# Altium PCB CH32F207&V307V-R3-2v0.PcbDoc (part 1 of 2)
Units mil, origin at the board's own origin, x right, y up, seen from the top; angles counter-clockwise.
Board outline 2913.39 x 3937.01 mil, 2 copper layers (Top Layer, Bottom Layer); 74 components, 114 nets, 419 pads, 786 vias.
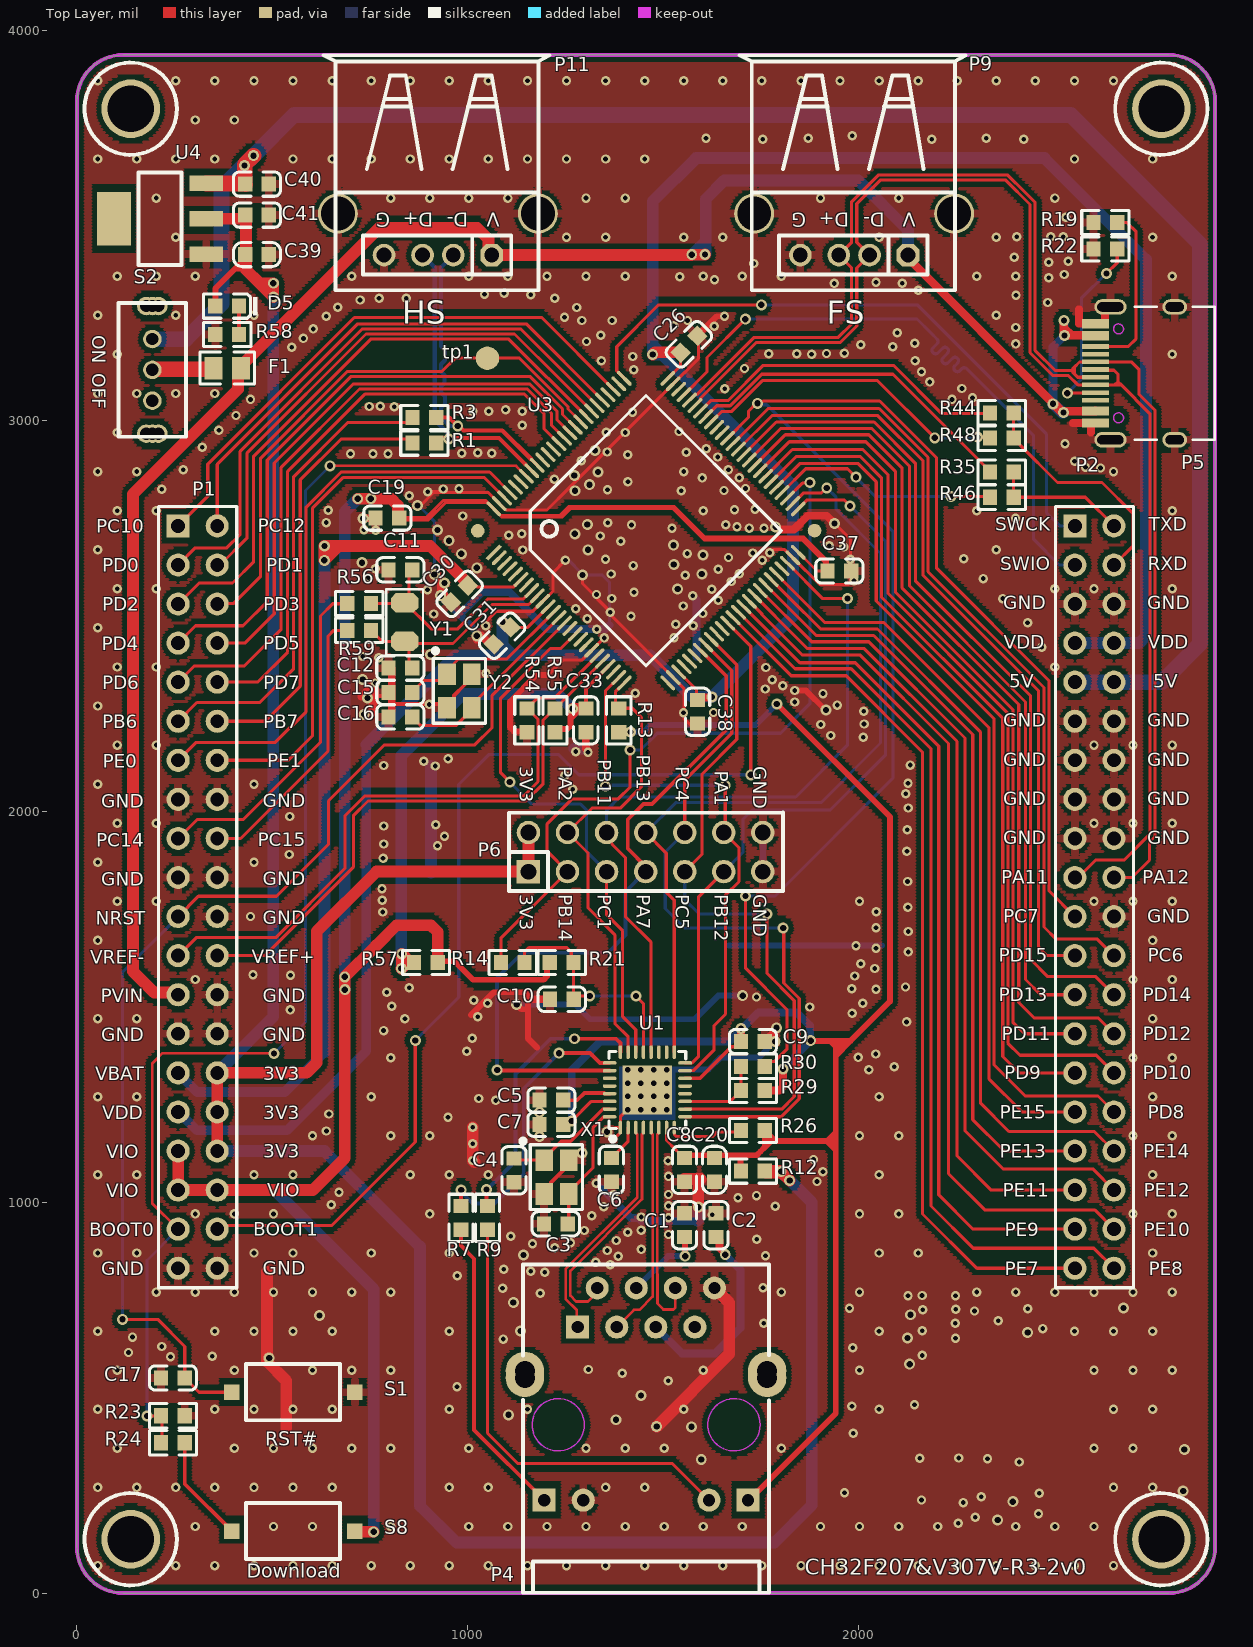
[diagram p0: Top Layer view]
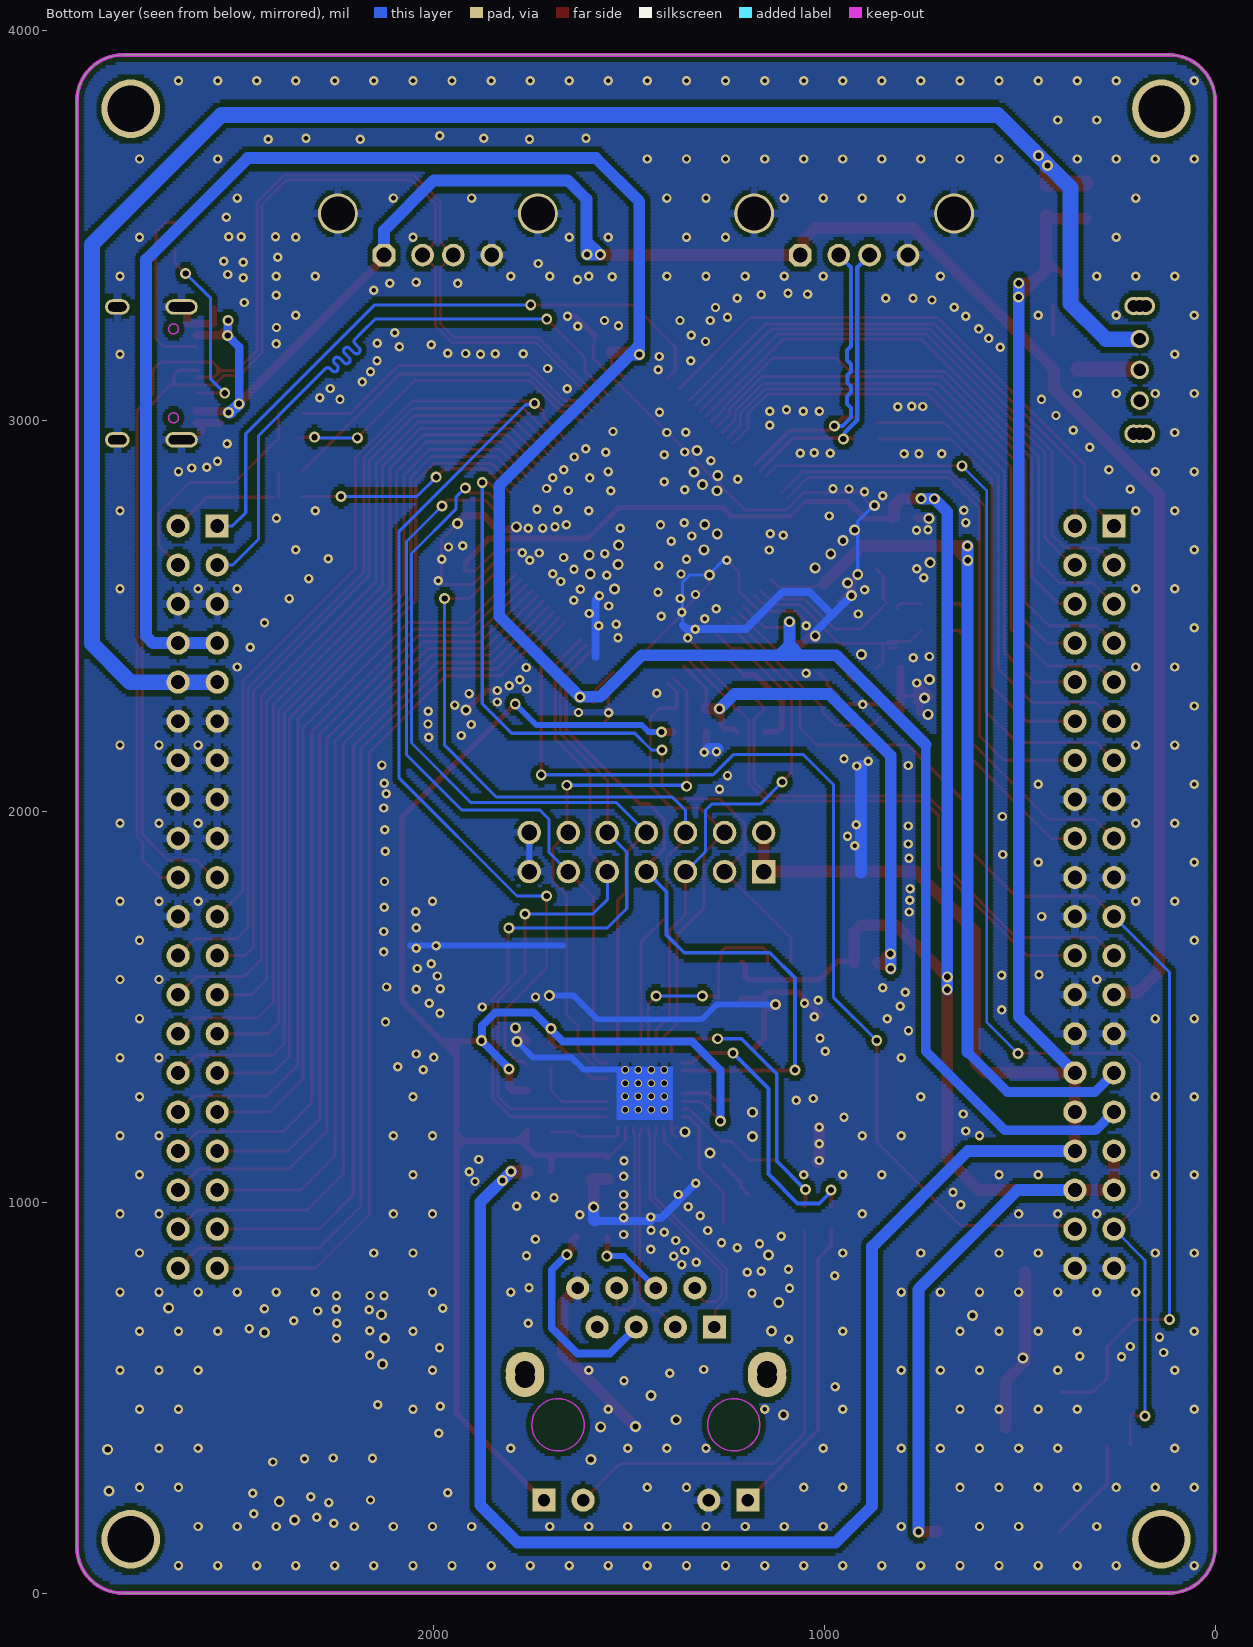
[diagram p1: Bottom Layer view, seen from below]

## Layer stack, top to bottom
Top Solder: solder mask 0.4, Solder Resist, Dk 3.5
Top Layer: signal copper 1.4
Dielectric 1: dielectric 12.6, FR-4, Dk 4.8
Bottom Layer: signal copper 1.4
Bottom Solder: solder mask 0.4, Solder Resist, Dk 3.5

## Board outline
0,118.11 0,3818.9 cw(c118.11,3818.9) 118.11,3937.01 2795.54,3937.01 2795.28,3937.01 cw(c2795.28,3818.9) 2913.39,3818.9 2913.38,3818.9 2913.39,118.06 2913.39,118.11 cw(c2795.28,118.11) 2795.28,0 118.11,0 cw(c118.11,118.11)

## Design rules (kind name [scope] priority, off if disabled: settings)
Clearance Clearance_2 [InPolygon] p1: gap=12 ignorepadtopadclearanceinfootprint=FALSE
Clearance [All] p2: gap=5 ignorepadtopadclearanceinfootprint=FALSE except(7: Arc-Via Track-Via SMDPad-Via THPad-Via Via-Via Via-Fill Via-Poly Via-Region Via-Text Via-Hole)
ComponentClearance [All] p1 off: gap=10 collisioncheckmode=3 verticalgap=10 showdistances=FALSE
DiffPairsRouting [All] p1: maxlimit=10 minlimit=5 mostfreqgap=10 toplayer_minwidth=6 toplayer_maxwidth=15 toplayer_prefwidth=15 bottomlayer_minwidth=6 bottomlayer_maxwidth=15 bottomlayer_prefwidth=15 maxuncoupledlength=500
MinimumSolderMaskSliver [All] p1 off: minsoldermaskwidth=10
PolygonConnect PolygonConnect_1 [IsVia] p1: connectstyle=Direct reliefconductorwidth=10 reliefentries=4 polygonreliefangle="90 Angle" airgapwidth=10
PolygonConnect [All] p2: connectstyle=Relief reliefconductorwidth=20 reliefentries=4 polygonreliefangle="90 Angle" airgapwidth=10
RoutingVias [All] p1: holewidth=28 width=50 viastyle="Through Hole" minholewidth=12 minwidth=24 maxholewidth=28 maxwidth=50
SilkToSilkClearance [All] p1 off: silktosilkclearance=10
SilkToSolderMaskClearance [IsPad] p1 off: minsilkscreentomaskgap=10 clearancetoexposedcopper=TRUE
SolderMaskExpansion [All] p1: expansion=4 istentingtop=FALSE
Width [All] p1: maxlimit=100 minlimit=5 preferedwidth=10
25 further rules are at their usual default settings.

## Classes and differential pairs
component class CH32F207&V307V-R3-2v0: C1 C2 C3 C4 C5 C6 C7 C8 C9 C10 C11 C12 C15 C16 C17 C19 C20 C26 C30 C31 C33 C37 C38 C39 C40 C41 D5 F1 P1 P2 P4 P5 P6 P9 P11 R1 R3 R7 R9 R12 R13 R14 R19 R21 R22 R23 R24 R26 R29 R30 R35 R44 R46 R48 R54 R55 R56 R57 R58 R59 S1 S2 S8 tp1 U1 U3 U4 X1 Y1 Y2
differential pair MDI_TX: +MDI_TX_P -MDI_TX_N
differential pair MDI_RX: +MDI_RX_P -MDI_RX_N
differential pair USB1D: +USB1D_p -USB1D_n
differential pair USB2D: +USB2D_p -USB2D_n

## Components (designator, comment, footprint, x,y, rotation, side; value= is the part's Value field where it differs from the comment)
C1 "1uF" 0603_C#1 1555.17,941.67 r270 top
C2 "1uF" 0603_C#1 1635.7,941.67 r270 top
C3 "NC" 0603_C#1 1225.72,945.26 r0 top
C4 "NC" 0603_C#1 1118.64,1082.21 r90 top
C5 "0.1uF" 0603_C#2 1184.23,1261.57 r0 top
C6 "1uF" 0603_C#1 1368.09,1083.21 r90 top
C7 "0.1uF" 0603_C#1 1214.55,1199.71 r0 top
C8 "0.1uF" 0603_C#1 1555.17,1083.21 r90 top
C9 "0.1uF" 0603_C#1 1730.28,1411.72 r180 top
C10 "0.1uF" 0603_C#2 1210.77,1519.95 r0 top
C11 "12pF" 0603_C#1 827.96,2619.12 r0 top
C12 "12pF" 0603_C#1 827.96,2367.29 r0 top
C15 "20pF" 0603_C#1 827.96,2305.51 r0 top
C16 "20pF" 0603_C#1 827.96,2242.28 r0 top
C17 "0.1uF" 0603_C#1 245.8,550.68 r0 top
C19 "0.1uF" 0603_C#1 794.73,2751.51 r180 top
C20 "10uF" 0603_C#3 1631.81,1052.9 r90 top
C26 "0.1uF" 0603_C#1 1566.47,3196.35 r225 top
C30 "0.1uF" 0603_C#1 979.48,2557.49 r45 top
C31 "0.1uF" 0603_C#1 1088.42,2450.44 r225 top
C33 "0.1uF" 0603_C#1 1302.56,2233.7 r270 top
C37 "0.1uF" 0603_C#1 1951.53,2616.04 r180 top
C38 "0.1uF" 0603_C#1 1588.66,2255.8 r90 top
C39 "10uF" 0603_C#3 430.55,3425.83 r0 top
C40 "0.1uF" 0603_C#1 460.87,3606.32 r0 top
C41 "0.1uF" 0603_C#1 460.87,3526.95 r0 top
D5 "蓝灯 0603" 0603_LED_S1 384.77,3294.04 r180 top
F1 "500mA" 0805 420.13,3135.37 r180 top
P1 "Header 20X2" HDR2X20 259.1,2731.51 r270 top
P2 "Header 20X2" HDR2X20 2554.28,2731.51 r270 top
P4 "HR911105A" HR911105A 1281.72,680.88 r0 top
P5 "USBFS" TYPE-C-Receptacle-2.0 2607.08,3121.88 r90 top
P6 "Header 7X2" IDC14-2.54mm 1155.72,1846.68 r90 top
P9 "USB" USBAF 2127.17,3424.57 r180 top
P11 "USB" USBAF 1061.8,3424.57 r180 top
R1 "0Ω" 0603 919.64,2943.45 r180 top
R3 "0Ω" 0603 919.64,3008.94 r180 top
R7 "470Ω" 0603 983.15,930.15 r90 top
R9 "470Ω" 0603 1050.89,930.15 r90 top
R12 "0Ω" 0603 1699.97,1080.19 r0 top
R13 "1.5K" 0603 1386.85,2203.39 r90 top
R14 "NC(0Ω)" 0603 1145.88,1614.12 r180 top
R19 "5.1K" 0603 2662.62,3507.98 r180 top
R21 "4.7K" 0603 1271.24,1614.12 r180 top
R22 "5.1K" 0603 2662.62,3440.28 r180 top
R23 "10K" 0603 215.49,453.94 r0 top
R24 "1K" 0603 215.49,384.84 r0 top
R26 "4.7K" 0603 1760.6,1184.11 r180 top
R29 "NC(4.7k)" 0603 1699.97,1286.53 r0 top
R30 "0Ω" 0603 1699.97,1348.23 r0 top
R35 "0Ω" 0603 2397.58,2869.04 r180 top
R44 "0Ω" 0603 2397.58,3020.84 r180 top
R46 "NC(0Ω)" 0603 2397.58,2804.8 r180 top
R48 "NC(0Ω)" 0603 2397.58,2955.92 r180 top
R54 "0Ω" 0603 1151.71,2203.39 r90 top
R55 "0Ω" 0603 1223.59,2203.39 r90 top
R56 "0Ω" 0603 752.92,2532.57 r180 top
R57 "0Ω" 0603 923.67,1614.12 r180 top
R58 "470Ω" 0603 354.45,3221.37 r0 top
R59 "0Ω" 0603 752.92,2464.16 r180 top
S1 "RST#" SMD_6.1x3.65x2.5mm-KEY 711.58,514.18 r180 top
S2 "SW SPDT" "Horizontal Slide Switch_8.7x4.4mm-2D" 106.49,3302.11 r270 top
S8 "Download" SMD_6.1x3.65x2.5mm-KEY 711.58,158.82 r180 top
tp1 "test-point" POINT 1050.77,3160.87 r0 top
U1 "CH182H" QFN32_5x5 1460.02,1288.04 r0 top
U3 "CH32V307VCT6/CH32F207VCT6" LQFP100 1066.95,2663.69 r315 top
U4 "1117-3.3V" SOT-223 213.1,3517.62 r0 top
X1 "25MHz" SMD-3225_4P 1227.31,1064.83 r270 top
Y1 "32768Hz" FC-135 838.79,2534.25 r270 top
Y2 "8MHz" SMD-3225_4P 978.93,2308.95 r270 top
? "" HOLE 2775.59,137.8 r0 top
? "" HOLE 137.8,137.8 r0 top
? "" HOLE 137.8,3799.21 r0 top
? "" HOLE 2775.59,3799.21 r0 top

## Footprints (in the part's own frame and the unit in brackets; to place one, negate y for a bottom-side part, rotate by r counter-clockwise, add the part's x,y. Pads: shape width x height; smd on the part's side, far side on the other; paste and mask are expansions set on the pad)
0603 [mm]
  rect 0.93x0.98 smd: 1(0,0) 2(1.54,0)
  silkscreen extent -0.76,-0.79 2.3,0.79
0603_C#1 [mm]
  rect 0.93x0.98 smd: 1(-0.77,0) 2(0.77,0)
  silkscreen extent -1.53,-0.79 1.54,0.79, body extent -0.8,-0.4 0.8,0.4, height 0.3
0603_C#2 [mm]
  rect 0.93x0.98 smd: 1(0,0) 2(1.54,0)
  silkscreen extent -0.76,-0.79 2.31,0.79
0603_C#3 [mm]
  rect 0.93x0.98 smd mask+0.051: 1(0,0) 2(1.54,0)
  silkscreen extent -0.76,-0.79 2.31,0.79
0603_LED_S1 [mm]
  rect 0.93x0.98 smd: A(0.77,0) K(-0.77,0)
  silkscreen extent -1.98,-0.79 1.54,0.79, body extent -0.8,-0.4 0.8,0.4, height 0.6
0805 [mm]
  rect 1.16x1.47 smd: 1(0,0) 2(1.78,0)
  silkscreen extent -0.88,-1.04 2.66,1.03
FC-135 [mil]
  oct 50x70 smd: 1(0,0) 2(98.43,0)
  silkscreen extent -35,-47 133,47
HDR2X20 [mm] "Connector; Header; 20x2 Position"
  rect 1.5x1.5 hole 0.9: 1(0,0)
  round 1.5 hole 0.9: 2(0,2.54) 3(2.54,0) 4(2.54,2.54) 5(5.08,0) 6(5.08,2.54) 7(7.62,0) 8(7.62,2.54) 9(10.16,0) 10(10.16,2.54) 11(12.7,0) 12(12.7,2.54) 13(15.24,0) 14(15.24,2.54) 15(17.78,0) 16(17.78,2.54) 17(20.32,0) 18(20.32,2.54) 19(22.86,0) 20(22.86,2.54) 21(25.4,0) 22(25.4,2.54) 23(27.94,0) 24(27.94,2.54) 25(30.48,0) 26(30.48,2.54) 27(33.02,0) 28(33.02,2.54) 29(35.56,0) 30(35.56,2.54) 31(38.1,0) 32(38.1,2.54) 33(40.64,0) 34(40.64,2.54) 35(43.18,0) 36(43.18,2.54) 37(45.72,0) 38(45.72,2.54) 39(48.26,0) 40(48.26,2.54)
  silkscreen extent -1.27,-1.27 49.53,3.81
HOLE [mm]
  round 3.81 hole 3: 0(0,0)
  silkscreen extent -3,-3 3,3
"Horizontal Slide Switch_8.7x4.4mm-2D" [mm]
  round 1.2 hole 0.8: 0(0.2,2.6) 0(0.2,2.2) 0(0.2,1.8) 0(8.5,1.8) 0(8.5,2.2) 0(8.5,2.6) 1(4.35,2.2) 2(2.35,2.2) 3(6.35,2.2)
  silkscreen extent 0,0 8.7,4.4
HR911105A [mm]
  rect 1.5x1.5 hole 0.8: 1(0,0) 9(-2.175,-11.252) 12(11.075,-11.252)
  round 1.5 hole 0.8: 2(1.27,2.54) 3(2.54,0) 4(3.81,2.54) 5(5.08,0) 6(6.35,2.54) 7(7.62,0) 8(8.89,2.54) 10(0.365,-11.252) 11(8.535,-11.252)
  round 2.5 hole 1.3: ""(-3.43,-2.852) ""(-3.43,-3.3) ""(12.32,-3.3) ""(12.32,-2.852)
  Keep-Out Layer circle w0.1: c-1.265,-6.352 r1.7
  Keep-Out Layer circle w0.1: c10.165,-6.352 r1.7
  silkscreen extent -3.55,-17.27 12.45,4.06
IDC14-2.54mm [mil]
  rect 60x60 hole 40: 1(0,0)
  round 60 hole 40: 2(100,0) 3(0,-100) 4(100,-100) 5(0,-200) 6(100,-200) 7(0,-300) 8(100,-300) 9(0,-400) 10(100,-400) 11(0,-500) 12(100,-500) 13(0,-600) 14(100,-600)
  silkscreen extent -50,-652 151,50
LQFP100 [mil]
  round 35 smd mask+2: 0(-68,10) 0(541.18,620)
  rect 9x50 smd mask+2: 1(0,0)
  oval 9x50 smd mask+2: 2(19.69,0) 3(39.37,0) 4(59.06,0) 5(78.74,0) 6(98.43,0) 7(118.11,0) 8(137.8,0) 9(157.48,0) 10(177.17,0) 11(196.85,0) 12(216.54,0) 13(236.22,0) 14(255.91,0) 15(275.59,0) 16(295.28,0) 17(314.96,0) 18(334.64,0) 19(354.33,0) 20(374.01,0) 21(393.7,0) 22(413.38,0) 23(433.07,0) 24(452.75,0) 25(472.44,0) 51(472.44,629.92) 52(452.75,629.92) 53(433.07,629.92) 54(413.39,629.92) 55(393.7,629.92) 56(374.02,629.92) 57(354.33,629.92) 58(334.65,629.92) 59(314.96,629.92) 60(295.27,629.92) 61(275.59,629.92) 62(255.9,629.92) 63(236.22,629.92) 64(216.54,629.92) 65(196.85,629.92) 66(177.17,629.92) 67(157.48,629.92) 68(137.8,629.92) 69(118.11,629.92) 70(98.43,629.92) 71(78.74,629.92) 72(59.06,629.92) 73(39.37,629.92) 74(19.69,629.92) 75(0,629.92)
  oval 50x9 smd mask+2: 26(551.18,78.74) 27(551.18,98.43) 28(551.18,118.11) 29(551.18,137.8) 30(551.18,157.48) 31(551.18,177.17) 32(551.18,196.85) 33(551.18,216.54) 34(551.18,236.22) 35(551.18,255.91) 36(551.18,275.59) 37(551.18,295.28) 38(551.18,314.96) 39(551.18,334.65) 40(551.18,354.33) 41(551.18,374.02) 42(551.18,393.7) 43(551.18,413.39) 44(551.18,433.07) 45(551.18,452.76) 46(551.18,472.44) 47(551.18,492.13) 48(551.18,511.81) 49(551.18,531.5) 50(551.18,551.18) 76(-78.74,551.18) 77(-78.74,531.5) 78(-78.74,511.81) 79(-78.74,492.13) 80(-78.74,472.44) 81(-78.74,452.76) 82(-78.74,433.07) 83(-78.74,413.39) 84(-78.74,393.7) 85(-78.74,374.02) 86(-78.74,354.33) 87(-78.74,334.65) 88(-78.74,314.96) 89(-78.74,295.28) 90(-78.74,275.59) 91(-78.74,255.91) 92(-78.74,236.22) 93(-78.74,216.54) 94(-78.74,196.85) 95(-78.74,177.17) 96(-78.74,157.48) 97(-78.74,137.8) 98(-78.74,118.11) 99(-78.74,98.43) 100(-78.74,78.74)
  silkscreen extent -8,70 481,560
POINT [mil] "测试点"
  round 60 smd: 1(0,0)
QFN32_5x5 [mil]
  round 20 hole 14 mask+2: 0(-50.12,-51.11) 0(-50.12,51.11) 0(-16.71,-16.7) 0(-16.71,16.7) 0(16.71,-16.7) 0(16.71,16.7) 0(50.12,-51.11) 0(50.12,51.11)
  rect 125.98x125.98 smd mask+2: 0(0,0)
  oval 9x35 smd mask+2: 1(-68.9,-96.49) 2(-49.21,-96.49) 3(-29.53,-96.49) 4(-9.84,-96.49) 5(9.84,-96.49) 6(29.53,-96.49) 7(49.21,-96.49) 8(68.9,-96.49) 17(68.9,96.49) 18(49.21,96.49) 19(29.53,96.49) 20(9.84,96.49) 21(-9.84,96.49) 22(-29.53,96.49) 23(-49.21,96.49) 24(-68.9,96.49)
  oval 35x9 smd mask+2: 9(96.49,-68.9) 10(96.49,-49.21) 11(96.49,-29.53) 12(96.49,-9.84) 13(96.49,9.84) 14(96.49,29.53) 15(96.49,49.21) 16(96.49,68.9) 25(-96.49,68.9) 26(-96.49,49.21) 27(-96.49,29.53) 28(-96.49,9.84) 29(-96.49,-9.84) 30(-96.49,-29.53) 31(-96.49,-49.21) 32(-96.49,-68.9)
  silkscreen extent -98,-131 98,98
SMD-3225_4P [mm]
  rect 1.4x1.15 smd: 1(-1.1,-0.8) 2(1.1,-0.8) 3(1.1,0.8) 4(-1.1,0.8)
  silkscreen extent -2.48,-2.32 2.1,1.7, body extent -1.6,-1.25 1.6,1.25, height 0.61
SMD_6.1x3.65x2.5mm-KEY [mm]
  rect 1x1 smd: 1(0,0) 2(8,0)
  silkscreen extent 0.98,-1.82 7.08,1.82
SOT-223 [mm]
  rect 2.2x1 smd: 1(3,-2.3) 2(3,0) 3(3,2.3)
  rect 2.2x3.5 smd: 2(-3,0)
  silkscreen extent -1.4,-3 1.4,3, body extent -3.49,-3.24 3.49,3.24, height 1.64
TYPE-C-Receptacle-2.0 [mm]
  oval 1x1.6 hole 0.6 slot 1.2 at 90 deg: 0(-4.32,-5.15) 0(4.32,-5.15)
  oval 1x2.1 hole 0.6 slot 1.7 at 90 deg: 0(-4.32,-0.97) 0(4.32,-0.97)
  rect 0.6x1.75 smd mask+0.051: A1(-3.225,0) A4(-2.45,0) B1(3.225,0) B4(2.45,0)
  rect 0.3x1.75 smd mask+0.051: A5(-1.25,0) A6(-0.25,0) A7(0.25,0) A8(1.25,0) B5(1.75,0) B6(0.75,0) B7(-0.75,0) B8(-1.75,0)
  Keep-Out Layer circle w0.1: c2.89,-1.5 r0.325
  Keep-Out Layer circle w0.1: c-2.89,-1.5 r0.325
  silkscreen extent -4.32,-7.75 4.32,-2.55
USBAF [mil]
  round 102.36 hole 86.61: 0(-118.11,-106.3) 0(393.7,-106.3)
  oct 58x58 hole 38: 1(0,0)
  round 58 hole 38: 2(98.43,0) 3(177.17,0) 4(275.59,0)
  silkscreen extent -148,-511 431,90

## Part data
C1 C2 C3 C4 C5 C6 C7 C8 C9 C10 C11 C12 C15 C16 C17 C19 C20 C26 C30 C31 C33 C37 C38 C39 C40 C41: library part CAP, "Capacitor"
D5: library part "0603 蓝灯", "发光二极管", Package=0603, SuppliersPartNumber=C72041, ComponentLink1Description=供应商链接, ComponentLink1URL=http://www.szlcsc.com/product/details_73150.html, Supplier=LC
F1: library part "Fuse 1", "Fuse", LatestRevisionDate=17-Jul-2002, LatestRevisionNote="Re-released for DXP Platform.", PackageDescription="Thru-Hole; 2 Leads", PackageReference=PIN-W2/E2.8, Published=8-Jun-2000, Publisher="Altium Limited"
P1 P2: "Header, 20-Pin, Dual row", LatestRevisionDate=17-Jul-2002, LatestRevisionNote="Re-released for DXP Platform.", Publisher="Altium Limited"
P4: library part HR911105A_1
P5: library part TYPE-C1
P6: "Header, 7-Pin, Dual row", LatestRevisionDate=17-Jul-2002, LatestRevisionNote="Re-released for DXP Platform.", Publisher="Altium Limited"
P9 P11: "USB Port"
R1 R3 R7 R9 R12 R13 R14 R19 R21 R22 R23 R24 R26 R29 R30 R35 R44 R46 R48 R54 R55 R56 R57 R58 R59: library part RES
S1 S8: library part KEY1
tp1: "测试点"
U1: "MII/RMII 10/100M Ethernet PHY (Transceiver) with auto MDIX"
U3: library part CH32V307V, "RISC-V FPU HD-MCU, 144MHz, USB_480M, USB OTG, 1000M Ethernet MAC, 2*CAN, FSMC+DVP"
X1: library part XTAL-2P, "2脚无源脚晶振"
Y1 Y2: library part XTAL, "Crystal Oscillator", LatestRevisionDate=17-Jul-2002, LatestRevisionNote="Re-released for DXP Platform.", PackageDescription="Crystal, Thru-Hole; 2 Leads; Body 3.1 x 8.2 mm (Dia.xH)", PackageReference=R38, Published=8-Jun-2000, Publisher="Altium Limited"

## Via types
v1: diameter 24, hole 12, Top Layer to Bottom Layer, tented both sides, 649 vias
v2: diameter 28, hole 16, Top Layer to Bottom Layer, tented both sides, 129 vias
v3: diameter 20, hole 14, Top Layer to Bottom Layer, tented both sides, 8 vias

## Nets (pads, with @x,y where several pads share a name; then routed paths per layer and width w, separated by ;. In a path a pad name is that pad's centre, name@x,y a point inside that pad or via, vN(x,y) a via of type N, cw(c..) or ccw(c..) an arc to the next point about the centre after c; other vN are vias at no path point)
3V3: C39.1 C41.1 D5.A P1.30 P1.32 P1.34 P6.1 P6.2 R12.2 U4.2@331.21,3517.62 | length 7565.9
  Top Layer w15: D5.A@354.45,3294.04 363.68,3303.27 357.01,3303.27 354.45,3305.83 354.45,3339.21 404.74,3389.5 ; 432.76,3387.38 430.64,3389.5 404.74,3389.5 ; C39.1@432.76,3428.04 432.76,3417.52 404.74,3389.5
  Top Layer w30: U4.2@331.21,3517.62 422.2,3517.62 430.55,3525.97 C41.1@430.55,3526.95 432.76,3524.75 C39.1@432.76,3428.04 ; P1.34@359.1,1131.51 P1.32@359.1,1231.51 P1.30@359.1,1331.51 587.81,1331.51 613.97,1357.66 613.97,1693.85 766.8,1846.68 P6.1@1155.72,1846.68 P6.2@1155.72,1946.68 ; C39.1@432.76,3417.52 432.76,3387.38 467.67,3352.47 ; v2(502.86,3317.27) 467.67,3352.47 ; v2(1802.3,1078.98) 1801.09,1080.19 R12.2@1760.6,1080.19 1760.6,1079.21 1763.9,1075.9 1804.53,1075.9 v2(1824.29,1056.15) ; 467.67,3352.47 v2(502.76,3352.47) 502.76,3331.85 ; 502.76,3331.85 502.76,3325.87 499.77,3328.86 502.76,3331.85
  Bottom Layer w30: P1.34@359.1,1131.51 633.62,1131.51 878.25,886.88 878.25,223 971.93,129.31 1785.55,129.31 1880.8,224.57 1880.8,1000.48 v2(1802.3,1078.98) ; P1.30@359.1,1331.51 502.76,1475.17 v2(502.76,3352.47)
5V: C40.1 P2.9 P2.10 S2.2 U4.3 | length 4798.4
  Top Layer w40: U4.3@331.21,3608.17 331.53,3607.85 429.02,3607.85 C40.1@430.55,3606.32 ; C40.1@429.61,3609.92 429.19,3610.34 v2(429.19,3653.62) 429.19,3656.21 v2(451.99,3679)
  Bottom Layer w40: S2.2@193.1,3209.59 279.45,3209.59 370.15,3300.29 370.15,3597.16 426.61,3653.62 v2(429.19,3653.62) 429.19,3656.21 v2(451.99,3679) 556.04,3783.06 2543.89,3783.06 2874.64,3452.31 2874.64,2429.59 2776.56,2331.51 P2.10@2654.28,2331.51 ; P2.9@2554.28,2331.51 P2.10@2658.73,2331.51
BOOT0: P1.37 R23.1 R24.1 U3.94 | length 3478.9
  Top Layer w7: v2(179.35,453.46) 201.93,453.46 209.43,460.97 215.49,454.92 217.57,452.83 217.57,386.93 R24.1@215.49,384.84 ; P1.37@259.1,931.51 192.95,997.67 192.95,1355.98 218.82,1381.86 503.98,1381.86 v2(504.62,1381.23) ; v2(647.9,2885.12) 1123.91,2885.12 U3.94@1150.47,2858.56
  Top Layer w10: R24.1@215.49,384.84 R24.1@217.57,382.75
  Bottom Layer w7: v2(179.35,453.46) 179.35,851.76 P1.37@259.1,931.51 ; v2(504.62,1381.23) 584.84,1461.45 584.84,2822.06 v2(647.9,2885.12)
BOOT1: P1.38 U3.37 | length 2773.9
  Top Layer w8: P1.38@359.1,931.51 368.38,940.79 652.37,940.79 866.14,1154.56 v2(866.14,1414.38) ; U3.37@1665.48,2482.74 1724.82,2423.4 v2(1724.82,2094.48)
  Bottom Layer w8: v2(866.14,1414.38) 977.24,1525.48 977.24,2069.51 1053.82,2146.09 1233.28,2146.09 1284.89,2094.48 v2(1724.82,2094.48)
DP_PWDN: U3.7
DVP_D2/SDIO_D0: U3.65
DVP_D3/SDIO_D1: U3.66
DVP_D4/SDIO_D3: U3.79
DVP_D7: U3.96
DVP_HSYNC: U3.29 | length 0
DVP_PCLK: U3.31
DVP_VSYNC: U3.30
FSMC_A16: P2.27 U3.58 | length 2113.5
  Top Layer w8: U3.58@1749,2872.48 1823.45,2946.94 2019.02,2946.94 2094.98,2870.97 2094.98,2562.24 2395.68,2261.54 2395.68,1461.15 2425.32,1431.51 P2.27@2554.28,1431.51
FSMC_A17: P2.28 U3.59 | length 2213.4
  Top Layer w8: U3.59@1735.08,2886.4 1813.39,2964.71 2027.19,2964.71 2111.59,2880.31 2111.59,2573.34 2410.51,2274.43 2410.51,1511.54 2449.73,1472.32 2613.47,1472.32 P2.28@2654.28,1431.51
FSMC_A18: P2.25 U3.60 | length 2062.4
  Top Layer w8: U3.60@1721.16,2900.32 1801.61,2980.77 2034.68,2980.77 2130.93,2884.53 2130.93,2577.9 2428.09,2280.74 2428.09,1570.47 2467.04,1531.51 P2.25@2554.28,1531.51
FSMC_CLK: P1.6 tp1.1 U3.84 | length 1439.9
  Top Layer w8: P1.6@359.1,2531.51 360.04,2532.45 400.63,2532.45 470.4,2602.22 470.4,2904.98 691.9,3126.48 934.26,3126.48 968.65,3160.87 tp1.1@1050.77,3160.87 1132.88,3160.87 1256.87,3036.89 1256.87,3030.55 U3.84@1289.66,2997.76
FSMC_D0: P2.26 U3.61 | length 2160.1
  Top Layer w8: U3.61@1707.24,2914.24 1790.43,2997.43 2040.56,2997.43 2146.07,2891.92 2146.07,2591.24 2441.09,2296.22 2441.09,1621.52 2484.75,1577.86 2607.93,1577.86 P2.26@2654.28,1531.51
FSMC_D1: P2.23 U3.62 | length 2025.2
  Top Layer w8: U3.62@1693.32,2928.16 1778.93,3013.76 2050.17,3013.76 2165.5,2898.43 2165.5,2604.77 2461.4,2308.87 2461.4,1653.05 2482.93,1631.51 P2.23@2554.28,1631.51
FSMC_D2: P1.3 U3.81 | length 1528.5
  Top Layer w8: P1.3@259.1,2631.51 302.96,2675.37 383.6,2675.37 417.72,2709.5 417.72,2922.35 731.02,3235.65 1135.29,3235.65 U3.81@1331.42,3039.52
FSMC_D3: P1.4 U3.82 | length 1412.3
  Top Layer w8: P1.4@359.1,2631.51 366.43,2631.51 435.73,2700.81 435.73,2918.31 740.07,3222.65 1120.08,3222.65 1236.71,3106.02 1237.07,3106.02 U3.82@1317.5,3025.6
FSMC_D4: P2.39 U3.38 | length 2257
  Top Layer w8: U3.38@1679.4,2496.66 1828.24,2347.82 1969.05,2347.82 2164.47,2152.4 2164.47,970.45 2303.4,831.51 P2.39@2554.28,831.51
FSMC_D5: P2.40 U3.39 | length 2342.1
  Top Layer w8: U3.39@1693.32,2510.58 1837.94,2365.96 1981.59,2365.96 2186.14,2161.41 2186.14,990.96 2294.34,882.76 2603.04,882.76 P2.40@2654.28,831.51
FSMC_D6: P2.37 U3.40 | length 2179.7
  Top Layer w8: U3.40@1707.24,2524.5 1812.97,2418.78 1850.4,2381.34 1992.52,2381.34 2205.96,2167.9 2205.96,1019.29 2293.73,931.51 P2.37@2554.28,931.51
FSMC_D7: P2.38 U3.41 | length 2244.9
  Top Layer w8: U3.41@1721.16,2538.42 1752.74,2506.84 1752.74,2504.68 1856.02,2401.39 2004.03,2401.39 2230.83,2174.59 2230.83,1073.62 2323.58,980.88 2604.92,980.88 P2.38@2654.28,931.51
FSMC_D8: P2.35 U3.42 | length 2070.6
  Top Layer w8: U3.42@1735.08,2552.34 1840.64,2446.78 1870.14,2417.28 2015.32,2417.28 2252.64,2179.96 2252.64,1119.14 2340.27,1031.51 P2.35@2554.28,1031.51
FSMC_D9: P2.36 U3.43 | length 2129.9
  Top Layer w8: U3.43@1749,2566.26 1880.39,2434.87 2026.67,2434.87 2272.97,2188.56 2272.97,1183.16 2370.41,1085.73 2600.07,1085.73 P2.36@2654.28,1031.51
FSMC_D10: P2.33 U3.44 | length 1968.8
  Top Layer w8: U3.44@1762.92,2580.18 1891.99,2451.1 2039.37,2451.1 2292.82,2197.65 2292.82,1211.99 2373.3,1131.51 P2.33@2554.28,1131.51
FSMC_D11: P2.34 U3.45 | length 2039.6
  Top Layer w8: U3.45@1776.84,2594.1 1822.94,2548 1903.42,2467.51 2049.26,2467.51 2312.32,2204.45 2312.32,1254.67 2385.44,1181.56 2604.24,1181.56 P2.34@2654.28,1131.51
FSMC_D12: P2.31 U3.46 | length 1860.1
  Top Layer w8: U3.46@1790.76,2608.01 1914.86,2483.92 2065.74,2483.92 2334.23,2215.42 2334.23,1316.7 2419.42,1231.51 P2.31@2554.28,1231.51
FSMC_D13: P2.32 U3.55 | length 2273.7
  Top Layer w8: U3.55@1790.76,2830.73 1851.55,2891.52 1998.65,2891.52 2045.92,2844.24 2045.92,2539.24 2347.23,2237.93 2347.23,1352.44 2427.41,1272.26 2613.53,1272.26 P2.32@2654.28,1231.51
FSMC_D14: P2.29 U3.56 | length 2143.9
  Top Layer w8: U3.56@1776.84,2844.64 1841.75,2909.55 2004.51,2909.55 2058.92,2855.14 2058.92,2549.66 2369.6,2238.99 2369.6,1373.45 2411.54,1331.51 P2.29@2554.28,1331.51
FSMC_D15: P2.30 U3.57 | length 2253.1
  Top Layer w8: U3.57@1762.92,2858.56 1831.35,2927 2011.3,2927 2075.95,2862.35 2075.95,2558.95 2382.68,2252.22 2382.68,1407.61 2413.78,1376.51 2609.29,1376.51 P2.30@2654.28,1331.51
FSMC_NBL0: P1.13 U3.97 | length 1483.7
  Top Layer w8: P1.13@259.1,2131.51 305.13,2177.54 508.08,2177.54 586.67,2256.13 586.67,2779.5 676.55,2869.37 1056.29,2869.37 1108.71,2816.95 U3.97@1108.71,2816.81
FSMC_NBL1: P1.14 U3.98 | length 1398.8
  Top Layer w8: P1.14@359.1,2131.51 540.72,2131.51 602.82,2193.62 602.82,2776.33 682.1,2855.61 1042.07,2855.61 U3.98@1094.79,2802.89
FSMC_NE1_NCE2: P1.10 U3.88 | length 1526.2
  Top Layer w8: P1.10@359.1,2331.51 462.36,2331.51 539.4,2408.54 539.4,2871.01 737.22,3068.84 1145.72,3068.84 1195.11,3019.44 1195.11,2980.95 U3.88@1233.98,2942.08
FSMC_NOE: P1.7 U3.85 | length 1573.4
  Top Layer w8: P1.7@259.1,2431.51 303.41,2475.82 425.16,2475.82 487.07,2537.73 487.07,2899.89 700.67,3113.48 765.26,3113.48 1160.47,3113.48 1242.87,3031.09 1242.87,3016.71 U3.85@1275.74,2983.84
FSMC_NWAIT: P1.9 U3.87 | length 1612.3
  Top Layer w8: P1.9@259.1,2331.51 300.84,2373.25 428.99,2373.25 522.74,2467 522.74,2881.42 723.16,3081.84 1152.52,3081.84 1214.87,3019.49 1214.87,2989.04 U3.87@1247.9,2956
FSMC_NWE: P1.8 U3.86 | length 1468.7
  Top Layer w8: P1.8@359.1,2431.51 359.61,2432.02 360.11,2431.51 429.81,2431.51 505.07,2506.77 505.07,2892.49 707.41,3094.84 769.12,3094.84 1159.32,3094.84 1228.87,3025.29 1228.87,3002.88 1236.36,2995.38 U3.86@1261.82,2969.92

## Text inside footprints (layer, text, board x,y; h text height)
P9: Top Overlay "G" at 1867.17,3544.57 h60 r180; Top Overlay "V" at 2147.17,3544.57 h60 r180; Top Overlay "D+" at 1977.17,3544.57 h60 r180; Top Overlay "D-" at 2067.17,3544.57 h60 r180
P11: Top Overlay "G" at 801.8,3544.57 h60 r180; Top Overlay "V" at 1081.8,3544.57 h60 r180; Top Overlay "D+" at 911.8,3544.57 h60 r180; Top Overlay "D-" at 1001.8,3544.57 h60 r180